# Altium PCB aaa.PcbDoc
Units mil, origin at the board's own origin, x right, y up, seen from the top; angles counter-clockwise.
Board outline 1968.5 x 1181.1 mil, 2 copper layers (Top Layer, Bottom Layer); 29 components, 47 nets, 193 pads, 118 vias.
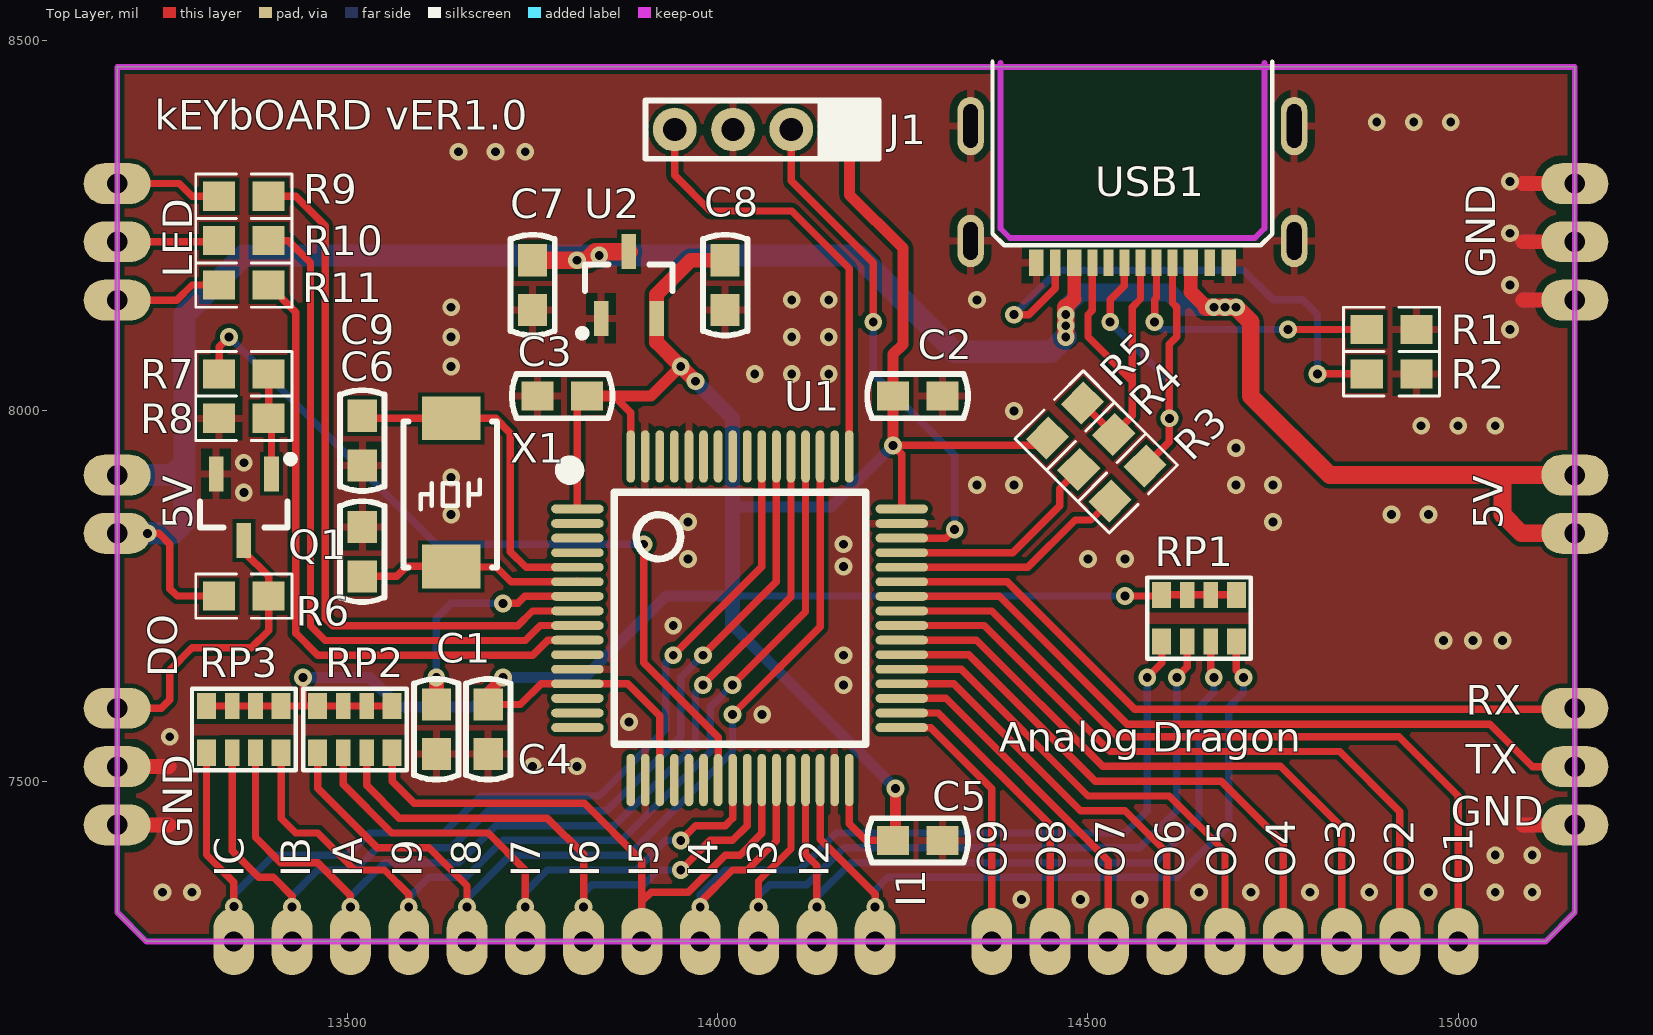
[diagram p0: Top Layer view]
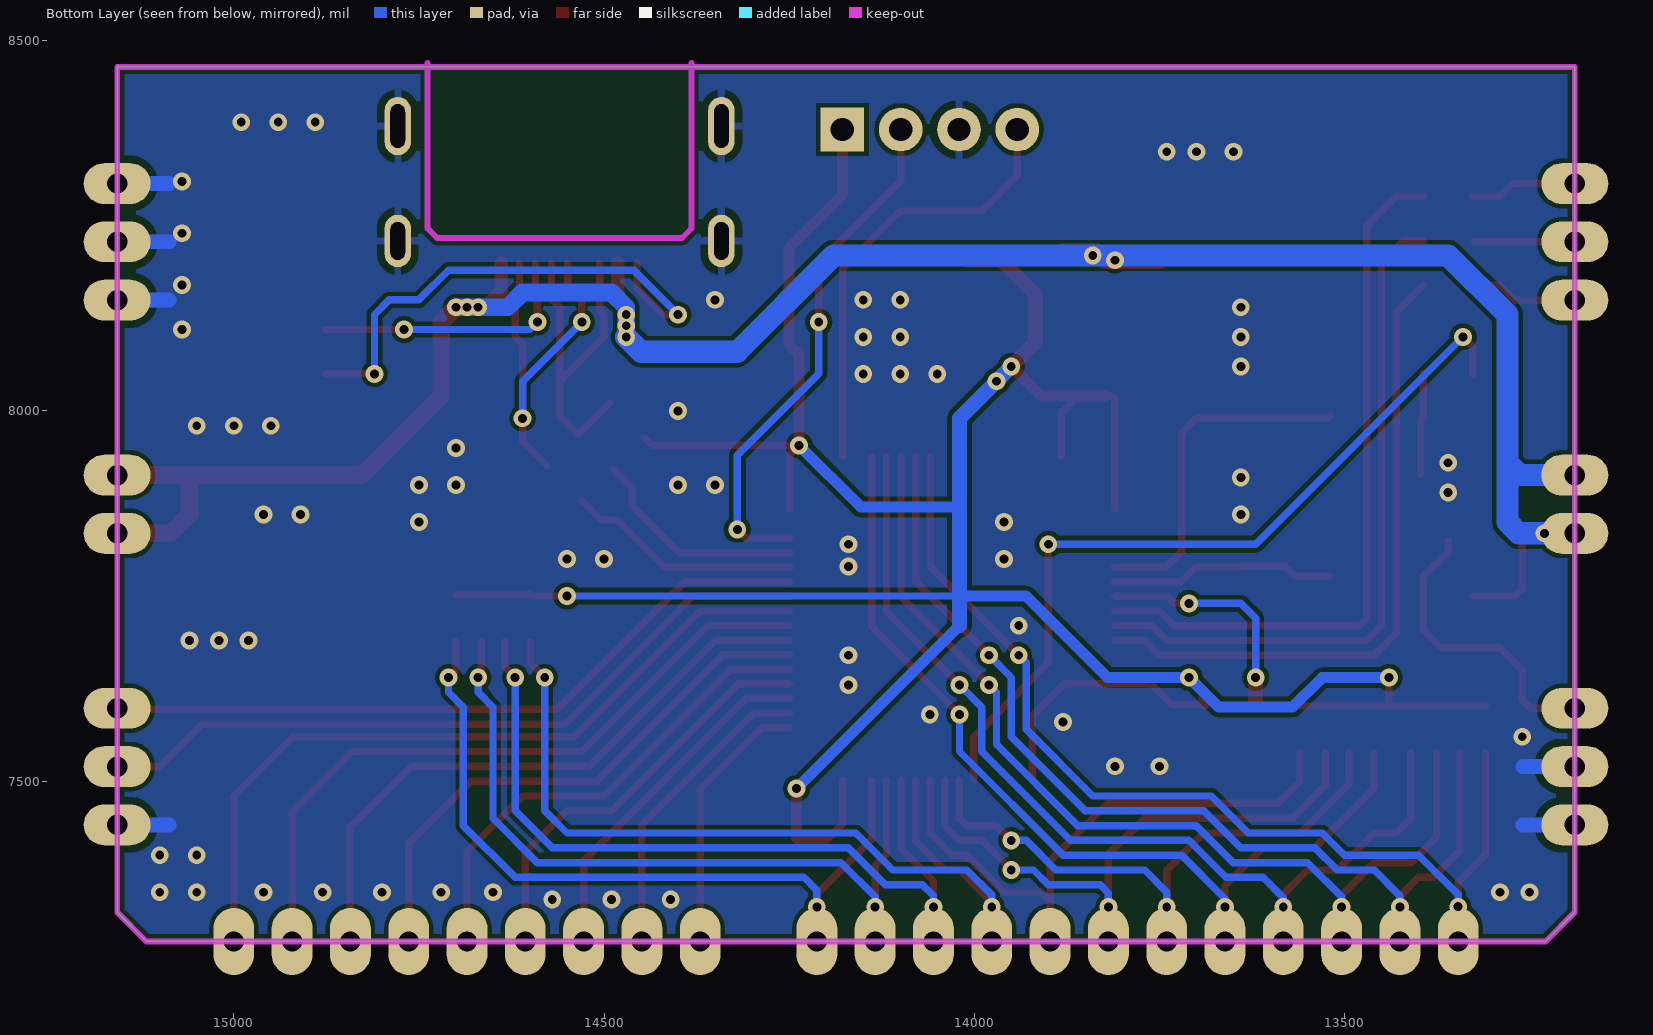
[diagram p1: Bottom Layer view, seen from below]

## Layer stack, top to bottom
Top Layer: signal copper 1.4
Dielectric: dielectric 12.6, FR-4, Dk 4.8
Bottom Layer: signal copper 1.4

## Board outline
13188.98,8464.57 13188.98,7322.83 13228.35,7283.46 15118.11,7283.46 15157.48,7322.83 15157.48,8464.57

## Design rules (kind name [scope] priority, off if disabled: settings)
Clearance [All] p1: gap=6
ComponentClearance [All] p1 off: gap=10 collisioncheckmode=3 verticalgap=10 showdistances=FALSE
DiffPairsRouting [All] p1: maxlimit=10 minlimit=10 mostfreqgap=10 maxuncoupledlength=500
Height [All] p1 off: minheight=0 maxheight=1000 prefheight=500
PolygonConnect PolygonConnect_1 [IsVia] p1: connectstyle=Direct reliefconductorwidth=10 reliefentries=4 polygonreliefangle="90 Angle" airgapwidth=10
PolygonConnect [All] p2: connectstyle=Relief reliefconductorwidth=10 reliefentries=4 polygonreliefangle="90 Angle" airgapwidth=10
RoutingVias [All] p1: holewidth=28 width=50 viastyle="Through Hole" minholewidth=28 minwidth=50 maxholewidth=28 maxwidth=50
SolderMaskExpansion [All] p1: expansion=4
Width [All] p1: maxlimit=100 minlimit=10 preferedwidth=10
25 further rules are at their usual default settings.

## Classes and differential pairs
differential pair USB0: +USB0_P -USB0_N
differential pair USB: +USB_P -USB_N

## Components (designator, comment, footprint, x,y, rotation, side; value= is the part's Value field where it differs from the comment)
C1 "Cap" C-RAD-0603 13620,7570 r90 top
C2 "Cap" C-RAD-0603 14270,8020 r180 top
C3 "Cap" C-RAD-0603 13790,8020 r0 top
C4 "Cap" C-RAD-0603 13690,7570 r90 top
C5 "Cap" C-RAD-0603 14270,7420 r180 top
C6 "Cap" C-RAD-0603 13520,7960 r270 top
C7 "Cap" C-RAD-0603 13750,8170 r90 top
C8 "Cap" C-RAD-0603 14010,8170 r90 top
C9 "Cap" C-RAD-0603 13520,7810 r90 top
J1 "HDR-1X4" HDR2.0-LI-4P 14060,8380 r180 top
Q1 "SI2302" SOT23-3N 13360,7870 r180 top
R1 "Res1" 0603-1 14910,8110 r0 top
R2 "Res1" 0603-1 14910,8050 r0 top
R3 "Res1" 0603-1 14553.64,7902.22 r225 top
R4 "Res1" 0603-1 14511.21,7944.64 r225 top
R5 "Res1" 0603-1 14468.79,7987.07 r225 top
R6 "Res1" 0603-1 13360,7750 r0 top
R7 "Res1" 0603-1 13360,8050 r0 top
R8 "Res1" 0603-1 13360,7990 r180 top
R9 "Res1" 0603-1 13360,8290 r180 top
R10 "Res1" 0603-1 13360,8230 r180 top
R11 "Res1" 0603-1 13360,8170 r180 top
RP1 "103" RCA-8P4R-0603 14650,7720 r180 top
RP2 "103" RCA-8P4R-0603 13510,7570 r180 top
RP3 "103" RCA-8P4R-0603 13360,7570 r180 top
U1 "STM32F103RCT6" "LQFP64 10x10_N" 14030,7720 r270 top
U2 "XC6206P332MR" SOT23-3N 13880,8170 r0 top
USB1 "TYPE-C" TYPE-C 14430,8200 r0 top
X1 "XTAL-2P" X_5032 13640,7820 r90 top

## Footprints (in the part's own frame and the unit in brackets; to place one, negate y for a bottom-side part, rotate by r counter-clockwise, add the part's x,y. Pads: shape width x height; smd on the part's side, far side on the other; paste and mask are expansions set on the pad)
0603-1 [mm] "贴片带丝印"
  rect 1.1x1 smd: 1(-0.85,0) 2(0.85,0)
  silkscreen extent -1.65,-0.76 1.65,0.76, body extent -1.14,-0.38 1.14,0.38, height 1
C-RAD-0603 [mm] "贴片电容"
  rect 1.1x1 smd: 1(-0.85,0) 2(0.85,0)
  silkscreen extent -1.73,-0.76 1.73,0.76, body extent -1.14,-0.38 1.14,0.38, height 1
HDR2.0-LI-4P [mm] "直插，脚距：2.0mm"
  rect 1.5x1.5 hole 0.8: 1(-3,0)
  round 1.5 hole 0.8: 2(-1,0) 3(1,0) 4(3,0)
  silkscreen extent -4,-1 4,1, body extent -4,-1 4,1, height 6.5
"LQFP64 10x10_N" [mm] "64脚，体宽10x10mm，脚距0.5mm"
  oval 0.3x1.8 smd: 1(-3.75,-5.575) 2(-3.25,-5.575) 3(-2.75,-5.575) 4(-2.25,-5.575) 5(-1.75,-5.575) 6(-1.25,-5.575) 7(-0.75,-5.575) 8(-0.25,-5.575) 9(0.25,-5.575) 10(0.75,-5.575) 11(1.25,-5.575) 12(1.75,-5.575) 13(2.25,-5.575) 14(2.75,-5.575) 15(3.25,-5.575) 16(3.75,-5.575) 33(3.75,5.55) 34(3.25,5.55) 35(2.75,5.55) 36(2.25,5.55) 37(1.75,5.55) 38(1.25,5.55) 39(0.75,5.55) 40(0.25,5.55) 41(-0.25,5.55) 42(-0.75,5.55) 43(-1.25,5.55) 44(-1.75,5.55) 45(-2.25,5.55) 46(-2.75,5.55) 47(-3.25,5.55) 48(-3.75,5.55)
  oval 1.8x0.3 smd: 17(5.55,-3.75) 18(5.55,-3.25) 19(5.55,-2.75) 20(5.55,-2.25) 21(5.55,-1.75) 22(5.55,-1.25) 23(5.55,-0.75) 24(5.55,-0.25) 25(5.55,0.25) 26(5.55,0.75) 27(5.55,1.25) 28(5.55,1.75) 29(5.55,2.25) 30(5.55,2.75) 31(5.55,3.25) 32(5.55,3.75) 49(-5.55,3.75) 50(-5.55,3.25) 51(-5.55,2.75) 52(-5.55,2.25) 53(-5.55,1.75) 54(-5.55,1.25) 55(-5.55,0.75) 56(-5.55,0.25) 57(-5.55,-0.25) 58(-5.55,-0.75) 59(-5.55,-1.25) 60(-5.55,-1.75) 61(-5.55,-2.25) 62(-5.55,-2.75) 63(-5.55,-3.25) 64(-5.55,-3.75)
  silkscreen extent -5.33,-6.09 4.32,4.32, body extent -6,-6 6,6, height 1.45
RCA-8P4R-0603 [mm] "3.2mm*1.6mm*0.6mm(长*宽*厚)"
  rect 0.65x0.9 smd: 1(-1.28,0.8) 4(1.28,0.8) 5(1.28,-0.8) 8(-1.28,-0.8)
  rect 0.5x0.9 smd: 2(-0.4,0.8) 3(0.4,0.8) 6(0.4,-0.8) 7(-0.4,-0.8)
  silkscreen extent -1.78,-1.4 1.78,1.4, body extent -1.6,-0.8 1.6,0.8, height 0.6
SOT23-3N [mm] "3x1.3x1mm(长宽高)"
  rect 0.5x1.2 smd: 1(-0.95,-1.143) 2(0.95,-1.143) 3(0,1.143)
  silkscreen extent -1.73,-1.78 1.5,0.7, body extent -1.5,-1.2 1.5,1.2, height 1.05
TYPE-C [mm]
  rect 0.35x0.9 smd: CC1(4.129,0) CC2(0.654,0) D+1(3.579,0) D+2(1.929,0) D-1(4.679,0) D-2(3.029,0) SBU1(2.479,0) SBU2(5.954,0)
  oval 0.9x1.8 hole 0.5 slot 1.3 at 90 deg: GND(-2.246,0.75) GND(8.854,0.75)
  oval 0.9x2 hole 0.5 slot 1.5 at 90 deg: GND(-2.246,4.69) GND(8.854,4.69)
  rect 0.5x0.9 smd: GND(0.004,0) GND(6.604,0) VBUS(1.304,0) VBUS(5.304,0)
  Keep-Out Layer lines w0.2: -1.221,6.85 -1.221,1.175 -0.896,0.85 5.904,0.85 7.504,0.85 7.829,1.175 7.829,6.85
  silkscreen extent -1.5,0.6 8.1,6.9
X_5032 [mm]
  rect 1.5x2 smd: 1(-0.762,0) 2(4.318,0)
  silkscreen extent -0.79,-1.57 4.21,1.63

## Part data
C1 C2 C3 C4 C5 C6 C7 C8 C9: "无极性电容"
J1: library part "Header 4", "4P接插件"
Q1: "N沟道 20V/3A"
R1 R2 R3 R4 R5 R6 R7 R8 R9 R10 R11: "贴片电阻"
RP1 RP2 RP3: library part R-8P4R, "贴片网络排阻"
U2: "低压差线性稳压芯片"
USB1: library part USB-C
X1: "2脚无源脚晶振"

## Free pads (board coordinates)
  oval 55.12x90.55 hole 27.56: 1(13346.46,7283.46) 2(13425.2,7283.46) 3(13503.94,7283.46) 4(13582.68,7283.46) 5(13661.42,7283.46) 6(13740.16,7283.46) 7(13818.9,7283.46) 8(13897.64,7283.46) 9(13976.38,7283.46) 10(14055.12,7283.46) 11(14133.86,7283.46) 12(14212.6,7283.46) 13(14370.08,7283.46) 14(14448.82,7283.46) 15(14527.56,7283.46) 16(14606.3,7283.46) 17(14685.04,7283.46) 18(14763.78,7283.46) 19(14842.52,7283.46) 20(14921.26,7283.46) 21(15000,7283.46)
  oval 90.55x55.12 hole 27.56: 27(13188.98,7440.94) 27(13188.98,8149.61) 27(15157.48,7440.94) 27(15157.48,8149.61) 28(13188.98,7519.69) 28(13188.98,8228.35) 28(15157.48,7519.69) 28(15157.48,8228.35) 29(13188.98,7598.43) 29(13188.98,7834.65) 29(13188.98,7913.39) 29(13188.98,8307.09) 29(15157.48,7598.43) 29(15157.48,7834.65) 29(15157.48,7913.39) 29(15157.48,8307.09)

## Via types
v1: diameter 24, hole 12, Top Layer to Bottom Layer, 118 vias

## Nets (pads, with @x,y where several pads share a name; then routed paths per layer and width w, separated by ;. In a path a pad name is that pad's centre, name@x,y a point inside that pad or via, vN(x,y) a via of type N, cw(c..) or ccw(c..) an arc to the next point about the centre after c; other vN are vias at no path point)
3V3: C2.2 C3.2 C4.2 C5.2 C8.2 J1.1 R5.2 RP1.5 RP1.6 RP1.7 RP1.8 RP2.5 RP2.6 RP2.7 RP2.8 RP3.5 RP3.6 RP3.7 RP3.8 U1.1 U1.13 U1.19 U1.32 U1.48 U1.64 U2.2 | length 4573.3
  Top Layer w10: RP3.5 RP3.6 RP3.7 RP3.8 13440,7601.5 ; v1(13440,7640) 13440,7601.5 ; RP2.8 RP2.7 RP2.6 RP2.5 13440,7601.5 ; C4.2 13733.46,7603.46 13761.42,7631.42 U1.13 13878.58,7631.42 13921.73,7588.27 U1.19 ; U1.1 13810.5,8017.03 13813.46,8020 C3.2 ; 13860,8020 13882.36,7997.64 U1.64 ; U1.32 14177.64,7442.36 14200,7420 C5.2 ; U1.48 14248.5,7941.5 v1(14236.54,7953.46) 14435.18,7953.46 R5.2 ; v1(14550,7750) RP1.5@14598.11,7750 ; RP1.5 RP1.6 RP1.7 RP1.8
  Top Layer w15: C4.2 13690,7620 v1(13710,7640) ; C3.2 13860,8020 13910,8020 v1(13950,8060) ; J1.1 14178.11,8291.89 14250,8220 14250,8090 14236.54,8076.54 C2.2 v1(14236.54,7953.46) ; C5.2 14240,7423.46 v1(14240,7490)
  Top Layer w20: v1(13970,8040) v1(13950,8060) 13917.4,8092.6 U2.2 13917.4,8157.4 13963.46,8203.46 C8.2
  Bottom Layer w10: 14020,7750 v1(14550,7750)
  Bottom Layer w15: v1(13440,7640) 13530,7640 13570,7600 13670,7600 v1(13710,7640) 13820,7640 13930,7750 14020,7750 ; 14020,7710 v1(14240,7490) ; 14020,7870 14153.07,7870 v1(14236.54,7953.46)
  Bottom Layer w20: v1(13950,8060) v1(13970,8040) 14020,7990 14020,7870 14020,7750 14020,7710
GND: C1.1 C2.1 C3.1 C4.1 C5.1 C6.2 C7.1 C8.1 C9.2 J1.3 pad.27@13188.98,7440.94 pad.27@15157.48,7440.94 pad.27@15157.48,8149.61 pad.28@13188.98,7519.69 pad.28@15157.48,8228.35 pad.29@15157.48,8307.09 Q1.2 R1.2 R2.2 R8.2 U1.12 U1.18 U1.31 U1.47 U1.60 U1.63 U2.1 USB1.GND | length 840
  Top Layer w20: pad.27@13188.98,7440.94 13258.98,7440.94 ; pad.28@13188.98,7519.69 13258.98,7519.69 ; 15087.48,7440.94 pad.27@15157.48,7440.94 ; 15087.48,8149.61 pad.27@15157.48,8149.61 ; 15087.48,8228.35 pad.28@15157.48,8228.35 ; 15087.48,8307.09 pad.29@15157.48,8307.09
  Bottom Layer w20: pad.27@13188.98,7440.94 13258.98,7440.94 ; pad.28@13188.98,7519.69 13258.98,7519.69 ; 15087.48,7440.94 pad.27@15157.48,7440.94 ; 15087.48,8149.61 pad.27@15157.48,8149.61 ; 15087.48,8228.35 pad.28@15157.48,8228.35 ; 15087.48,8307.09 pad.29@15157.48,8307.09
  other v1: 14410,7340 14490,7340 14570,7340 13250,7350 13290,7350 14650,7350 14720,7350 14800,7350 14880,7350 14960,7350 15050,7350 15100,7350 15050,7400 15100,7400 13750,7520 13810,7520 13260,7560 13880,7580 14060,7590 14170,7630 14170,7670 14980,7690 15020,7690 15060,7690 13940,7710 14170,7790 13960,7800 14500,7800 14550,7800 14170,7820 13960,7850 14750,7850 13640,7860 14910,7860 14960,7860 13360,7890 14350,7900 14400,7900 14700,7900 14750,7900 13640,7910 13360,7930 14700,7950 14950,7980 15000,7980 15050,7980 14400,8000 14050,8050 14100,8050 14150,8050 13640,8060 13640,8100 14100,8100 14150,8100 15070,8110 13640,8140 14100,8150 14150,8150 14350,8150 15070,8170 15070,8240 15070,8310 13650,8350 13700,8350 13740,8350 14890,8390 14940,8390 14990,8390
KI1: pad.12 RP1.1 U1.30 | length 1078.4
  Top Layer w10: U1.30 14138.27,7421.73 14212.6,7347.4 pad.12 ; RP1.1 14700.39,7649.61 v1(14710,7640)
  Bottom Layer w10: pad.12@14212.6,7297.4 14212.6,7352.6 14230,7370 14620,7370 14690,7440 14690,7600 14710,7620 v1(14710,7640)
  other v1: 14212.6,7330
KI2: pad.11 RP1.2 U1.29 | length 1093.4
  Top Layer w10: U1.29 14118.58,7401.42 14133.86,7386.14 pad.11 ; RP1.2 14665.75,7644.25 v1(14670,7640)
  Bottom Layer w10: pad.11 14133.86,7343.86 14180,7390 14590,7390 14650,7450 14650,7600 14670,7620 v1(14670,7640)
  other v1: 14133.86,7330
KI3: pad.10 RP1.3 U1.28 | length 1130.8
  Top Layer w10: pad.10 14055.12,7365.12 14098.9,7408.9 U1.28 ; v1(14620,7640) 14634.25,7654.25 RP1.3
  Bottom Layer w10: pad.10@14055.12,7297.4 14055.12,7345.12 14070,7360 14120,7360 14170,7410 14570,7410 14620,7460 v1(14620,7640)
  other v1: 14055.12,7330
KI4: pad.9 RP1.4 U1.27 | length 1222.6
  Top Layer w10: pad.9 13976.38,7336.38 14020,7380 14040,7380 14079.21,7419.21 U1.27 ; v1(14580,7640) 14599.61,7659.61 RP1.4
  Bottom Layer w10: pad.9 13976.38,7346.38 14010,7380 14110,7380 14160,7430 14550,7430 14580,7460 v1(14580,7640)
  other v1: 13976.38,7330
KI5: pad.8 RP2.1 U1.26 | length 801.4
  Top Layer w10: RP2.1 13560.39,7499.61 13590,7470 13820,7470 13897.64,7392.36 13897.64,7337.64 ; pad.8 13897.64,7337.64 ; U1.26 14059.53,7429.53 14030,7400 14010,7400 13960,7350 13910,7350 13897.64,7337.64
KI6: pad.7 RP2.2 U1.25 | length 879.3
  Top Layer w10: RP2.2 13525.75,7494.25 13570,7450 13770,7450 13818.9,7401.1 pad.7 ; v1(13950,7380) 13990,7420 14020,7420 14039.84,7439.84 U1.25
  Bottom Layer w10: pad.7 13818.9,7348.9 13830,7360 13900,7360 13920,7380 v1(13950,7380)
  other v1: 13818.9,7330
KI7: pad.6 RP2.3 U1.24 | length 858.6
  Top Layer w10: RP2.3 13494.25,7495.75 13560,7430 13690,7430 13740.16,7379.84 pad.6@13740.16,7297.4 ; v1(13950,7420) 13970,7440 14010,7440 14020.16,7450.16 U1.24
  Bottom Layer w10: pad.6 13740.16,7350.16 13770,7380 13890,7380 13930,7420 v1(13950,7420)
  other v1: 13740,7330
KI8: pad.5 RP2.4 U1.51 | length 1325.9
  Top Layer w10: RP2.4 13459.61,7490.39 13540,7410 13610,7410 13661.42,7358.58 pad.5 ; v1(14020,7590) 14138.27,7708.27 U1.51
  Bottom Layer w10: pad.5 13661.42,7341.42 13720,7400 13880,7400 14020,7540 v1(14020,7590)
  other v1: 13661.42,7330
KI9: pad.4 RP3.1 U1.52 | length 1353.5
  Top Layer w10: RP3.1 13410.39,7449.61 13430,7430 13460,7430 13510,7380 13550,7380 13582.68,7347.32 pad.4@13582.68,7297.4 ; v1(14020,7630) 14118.58,7728.58 U1.52
  Bottom Layer w10: pad.4 13582.68,7342.68 13610,7370 13660,7370 13710,7420 13870,7420 13990,7540 13990,7600 v1(14020,7630)
  other v1: 13582.68,7330
KI10: pad.3 RP3.2 U1.53 | length 1377.3
  Top Layer w10: RP3.2 13375.75,7424.25 13410,7390 13460,7390 13503.94,7346.06 pad.3@13503.94,7297.4 ; v1(13980,7630) 14098.9,7748.9 U1.53
  Bottom Layer w10: pad.3 13503.94,7343.94 13550,7390 13650,7390 13700,7440 13860,7440 13970,7550 13970,7620 v1(13980,7630)
  other v1: 13503.94,7330
KI11: pad.2 RP3.3 U1.54 | length 1393.9
  Top Layer w10: RP3.3 13344.25,7405.75 13380,7370 13400,7370 13425.2,7344.8 pad.2@13425.2,7297.4 ; v1(13980,7670) 14079.21,7769.21 U1.54
  Bottom Layer w10: pad.2 13425.2,7345.2 13460,7380 13510,7380 13540,7410 13640,7410 13690,7460 13850,7460 13950,7560 13950,7640 v1(13980,7670)
  other v1: 13425.2,7330
KI12: pad.1 RP3.4 U1.55 | length 1417.7
  Top Layer w10: RP3.4 13309.61,7400.39 13346.46,7363.54 pad.1@13346.46,7297.4 ; v1(13940,7670) 14059.53,7789.53 U1.55
  Bottom Layer w10: pad.1 13346.46,7346.46 13400,7400 13500,7400 13530,7430 13630,7430 13680,7480 13840,7480 13930,7570 13930,7660 v1(13940,7670)
  other v1: 13346.46,7330.47
KO1: pad.21 U1.41 | length 1050
  Top Layer w10: U1.41@14250,7729.84 14370.16,7729.84 14540,7560 14920,7560 15000,7480 pad.21
KO2: pad.20 U1.40 | length 941.7
  Top Layer w10: U1.40@14250,7710.16 14359.84,7710.16 14530,7540 14840,7540 14921.26,7458.74 pad.20@14921.26,7292.4
KO3: pad.19 U1.39 | length 851.3
  Top Layer w10: U1.39@14250,7690.47 14349.53,7690.47 14520,7520 14760,7520 14842.52,7437.48 pad.19
KO4: pad.18 U1.38 | length 743
  Top Layer w10: U1.38@14250,7670.79 14339.21,7670.79 14510,7500 14680,7500 14763.78,7416.22 pad.18@14763.78,7292.4
KO5: pad.17 U1.37 | length 649.6
  Top Layer w10: U1.37@14250,7651.1 14328.9,7651.1 14500,7480 14610,7480 14685.04,7404.96 pad.17@14685.04,7292.4
KO6: pad.16 U1.36 | length 561.9
  Top Layer w10: U1.36@14250,7631.42 14318.58,7631.42 14490,7460 14550,7460 14606.3,7403.7 pad.16@14606.3,7292.4
KO7: pad.15 U1.35 | length 468.4
  Top Layer w10: U1.35@14250,7611.73 14308.27,7611.73 14527.56,7392.44 pad.15@14527.56,7292.4
KO8: pad.14 U1.34 | length 419
  Top Layer w10: U1.34@14250,7592.05 14297.95,7592.05 14448.82,7441.18 pad.14
KO9: pad.13 U1.33 | length 351.7
  Top Layer w10: U1.33@14250,7572.36 14287.64,7572.36 14370.08,7489.92 pad.13@14370.08,7292.4
LED1: R9.1 U1.8 | length 976
  Top Layer w10: R9.1 13430,8290 13470,8250 13470,7720 13480,7710 13730,7710 13749.84,7729.84 U1.8
LED2: R10.1 U1.9 | length 936.1
  Top Layer w10: R10.1 13420,8230 13450,8200 13450,7710 13470,7690 13740,7690 13760.16,7710.16 U1.9
LED3: R11.1 U1.10 | length 886.5
  Top Layer w10: R11.1 13430,8133.46 13430,7700 13460,7670 13750,7670 13770.47,7690.47 U1.10
LED10: pad.29@13188.98,8307.09 R9.2 | length 129.7
  Top Layer w10: pad.29@13203.91,8307.09 13272.91,8307.09 13290,8290 R9.2
LED20: pad.28@13188.98,8228.35 R10.2 | length 135.9
  Top Layer w10: pad.28@13188.98,8228.35 R10.2@13324.88,8228.35
LED30: pad.27@13188.98,8149.61 R11.2 | length 146
  Top Layer w10: pad.27@13188.98,8149.61 13269.61,8149.61 13290,8170 R11.2
LED_DATA: pad.29@13188.98,7598.43 Q1.3 R6.2 | length 392.9
  Top Layer w10: pad.29@13202.91,7598.43 13248.43,7598.43 13260,7610 13260,7650 13290,7680 13370,7680 13393.46,7703.46 R6.2 13393.46,7776.54 13360,7810 Q1.3
NetQ1_1: Q1.1 R7.2 R8.1 | length 131.1
  Top Layer w10: R8.1 R7.2 ; Q1.1 R8.1@13397.4,7986.06
NetR1_1: R1.1 USB1.CC1 | length 371.7
  Top Layer w10: v1(14590,8120) 14590,8150 14592.56,8152.56 USB1.CC1 ; v1(14770,8110) R1.1
  Bottom Layer w10: v1(14590,8120) 14600,8110 v1(14770,8110)
NetR2_1: R2.1 USB1.CC2 | length 711
  Top Layer w10: v1(14400,8130) 14420,8130 14455.75,8165.75 USB1.CC2 ; v1(14810,8050) R2.1
  Bottom Layer w10: v1(14400,8130) 14460,8190 14710,8190 14750,8150 14790,8150 14810,8130 v1(14810,8050)
NRST: C1.2 U1.7 | length 319.3
  Top Layer w10: v1(13710,7740) 13730,7740 13739.53,7749.53 U1.7
  Top Layer w20: C1.2 v1(13620,7640)
  Bottom Layer w10: v1(13620,7640) 13620,7720 13640,7740 v1(13710,7740)
OSC_IN: C6.1 U1.5 X1.2 | length 469
  Top Layer w10: C6.1 13523.46,7990 X1.2 13700,7990 13720,7970 13720,7810 13741.1,7788.9 U1.5
OSC_OUT: C9.1 U1.6 X1.1 | length 305.8
  Top Layer w10: C9.1 13566.54,7776.54 13580,7790 X1.1 13640.79,7789.21 13700.79,7789.21 13720.79,7769.21 U1.6 U1.6@13809.71,7770
SPI_CLK: U1.21
SPI_DO: R7.1 U1.23 | length 1091.7
  Top Layer w10: R7.1 13326.54,8086.54 v1(13340,8100) ; v1(13900,7820) 13900,7660 14000.47,7559.53 U1.23
  Bottom Layer w10: v1(13340,8100) 13620,7820 v1(13900,7820)
SWCLK: J1.4 U1.49 | length 603.6
  Top Layer w10: J1.4 13941.89,8318.11 13990,8270 14100,8270 14177.64,8192.36 U1.49
SWDIO: J1.2 U1.46 | length 707.7
  Top Layer w10: J1.2 14099.37,8310.63 14210,8200 v1(14210,8120) ; U1.46 14308.27,7828.27 v1(14320,7840)
  Bottom Layer w10: v1(14210,8120) 14210,8050 14320,7940 v1(14320,7840)
UART_RX: pad.29@15157.48,7598.43 U1.43 | length 966
  Top Layer w10: U1.43 14390.79,7769.21 14563,7597 15141.12,7597 pad.29@15142.54,7598.43
UART_TX: pad.28@15157.48,7519.69 U1.42 | length 989.2
  Top Layer w10: U1.42 14380.47,7749.53 14553,7577 15043,7577 15100.32,7519.69 pad.28@15142.54,7519.69
USB0_N: R3.1 USB1.D-1 USB1.D-2 | length 545.3
  Top Layer w10: v1(14530,8120) 14530,8150 14549.25,8169.25 USB1.D-2 ; R3.1 14610,7958.58 14610,8090 14620,8100 14620,8140 14614.21,8145.79 USB1.D-1
  Bottom Layer w10: v1(14530,8120) 14610,8040 v1(14610,7990)
USB0_P: R4.1 R5.1 USB1.D+1 USB1.D+2 | length 493.9
  Top Layer w10: R5.1 R4.1 14560,7993.43 14560,8040 ; USB1.D+2 14505.95,8135.95 14500,8130 14500,8100 14560,8040 ; USB1.D+1 14570.91,8151.08 14560,8140.18 14560,8040
USB_N: R3.2 U1.44 | length 355.1
  Top Layer w10: U1.44 14418.9,7788.9 14482.72,7852.72 14504.14,7852.72 ; 14504.14,7852.72 R3.2 14504.14,7852.72
USB_P: R4.2 U1.45 | length 335.9
  Top Layer w10: U1.45 14398.58,7808.58 14461.72,7871.72 14461.72,7895.15 ; 14461.72,7895.15 R4.2 14461.72,7895.15
VBUS: C7.2 pad.29@13188.98,7834.65 pad.29@13188.98,7913.39 pad.29@15157.48,7834.65 pad.29@15157.48,7913.39 R6.1 U2.3 USB1.VBUS | length 3337.6
  Top Layer w10: pad.29@13203.91,7834.65 v1(13230,7834.65) 13245.35,7834.65 13260,7820 13260,7760 13270,7750 R6.1
  Top Layer w18: 14481.34,8151.34 USB1.VBUS@14481.34,8200 ; 14638.82,8161.18 USB1.VBUS@14638.82,8200
  Top Layer w20: v1@14470,8140 14481.34,8151.34 ; 14638.82,8161.18 v1@14660,8140
  Top Layer w24: C7.2 13823.46,8203.46 13835,8215 U2.3 ; v1(14470,8100) v1(14470,8115) v1(14470,8130) v1@14470,8140 ; v1@14660,8140 v1(14670,8140) v1(14685,8140) v1(14700,8140) 14720,8120 14720,8020 14826.61,7913.39 15060,7913.39 ; pad.29@15135.54,7913.39 15060,7913.39 ; pad.29@15157.48,7834.65 15085.35,7834.65 15060,7860 15060,7913.39
  Bottom Layer w24: v1(14470,8100) v1(14470,8115) v1(14470,8130) 14470,8140 14490,8160 14610,8160 14630,8140 v1(14670,8140) v1(14685,8140) v1(14700,8140)
  Bottom Layer w30: pad.29@13188.98,7834.65 v1(13230,7834.65) 13264.65,7834.65 13280,7850 13280,7930 ; pad.29@13188.98,7913.39 13263.39,7913.39 13280,7930 ; v1(14470,8100) 14450,8080 14320,8080 14190,8210 13360,8210 13280,8130 13280,7930
  other v1: 13810,8203.46 13840,8210
pads on no net: U1.2 U1.3 U1.4 U1.11 U1.14 U1.15 U1.16 U1.17 U1.20 U1.22 U1.50 U1.56 U1.57 U1.58 U1.59 U1.61 U1.62 USB1.SBU1 USB1.SBU2

## Polygon pours and split planes (outlines as drawn)
GND on Top Layer "Top Layer-No Net" (solid, remove dead copper): 15157.48,8464.57 15157.48,7322.83 15118.11,7283.46 13228.35,7283.46 13188.98,7322.83 13188.98,8464.57
GND on Bottom Layer "Top Layer-No Net" (solid, remove dead copper, pour order 5): 13188.98,8464.57 13188.98,7322.83 13228.35,7283.46 15118.11,7283.46 15120,7285.35 15157.48,7322.83 15157.48,8464.57

## Keep-outs
Keep-Out Layer:
  the board outline again, w7.87

## Silkscreen, mask and mechanical layers (free items; w line width, h text height)
Top Overlay:
  text "kEYbOARD vER1.0" at 13240,8380 h40
  text "LED" at 13290,8180 h40 r90
  text "GND" at 15050,8180 h40 r90
  text "5V" at 13290,7840 h40 r90
  text "5V" at 15060,7840 h40 r90
  text "DO" at 13270,7640 h40 r90
  text "RX" at 15010,7590 h40
  text "Analog Dragon" at 14380,7540 h40
  text "TX" at 15010,7510 h40
  text "GND" at 14990,7440 h40
  text "GND" at 13290,7410 h40 r90
  text "IC" at 13360,7370 h40 r90
  text "IB" at 13450,7370 h40 r90
  text "IA" at 13520,7370 h40 r90
  text "I9" at 13600,7370 h40 r90
  text "I8" at 13680,7370 h40 r90
  text "I7" at 13760,7370 h40 r90
  text "I6" at 13840,7370 h40 r90
  text "I5" at 13920,7370 h40 r90
  text "I4" at 14000,7370 h40 r90
  text "I3" at 14080,7370 h40 r90
  text "I2" at 14150,7370 h40 r90
  text "O9" at 14390,7370 h40 r90
  text "O8" at 14470,7370 h40 r90
  text "O7" at 14550,7370 h40 r90
  text "O6" at 14630,7370 h40 r90
  text "O5" at 14700,7370 h40 r90
  text "O4" at 14780,7370 h40 r90
  text "O3" at 14860,7370 h40 r90
  text "O2" at 14940,7370 h40 r90
  text "O1" at 15020,7360 h40 r90
  text "I1" at 14280,7330 h40 r90